# Altium PCB CM5IO_IARC.PcbDoc (part 1 of 2)
Units mm, origin at the board's own origin, x right, y up, seen from the top; angles counter-clockwise.
Board outline 70.16 x 60.25 mm, 4 copper layers (Top Layer 1, Top Layer, Bottom Layer, Bottom Layer 1), stack 1.546 mm thick; 55 components, 163 nets, 374 pads, 88 vias.
Unrouted connection lines stored in the file: 69.
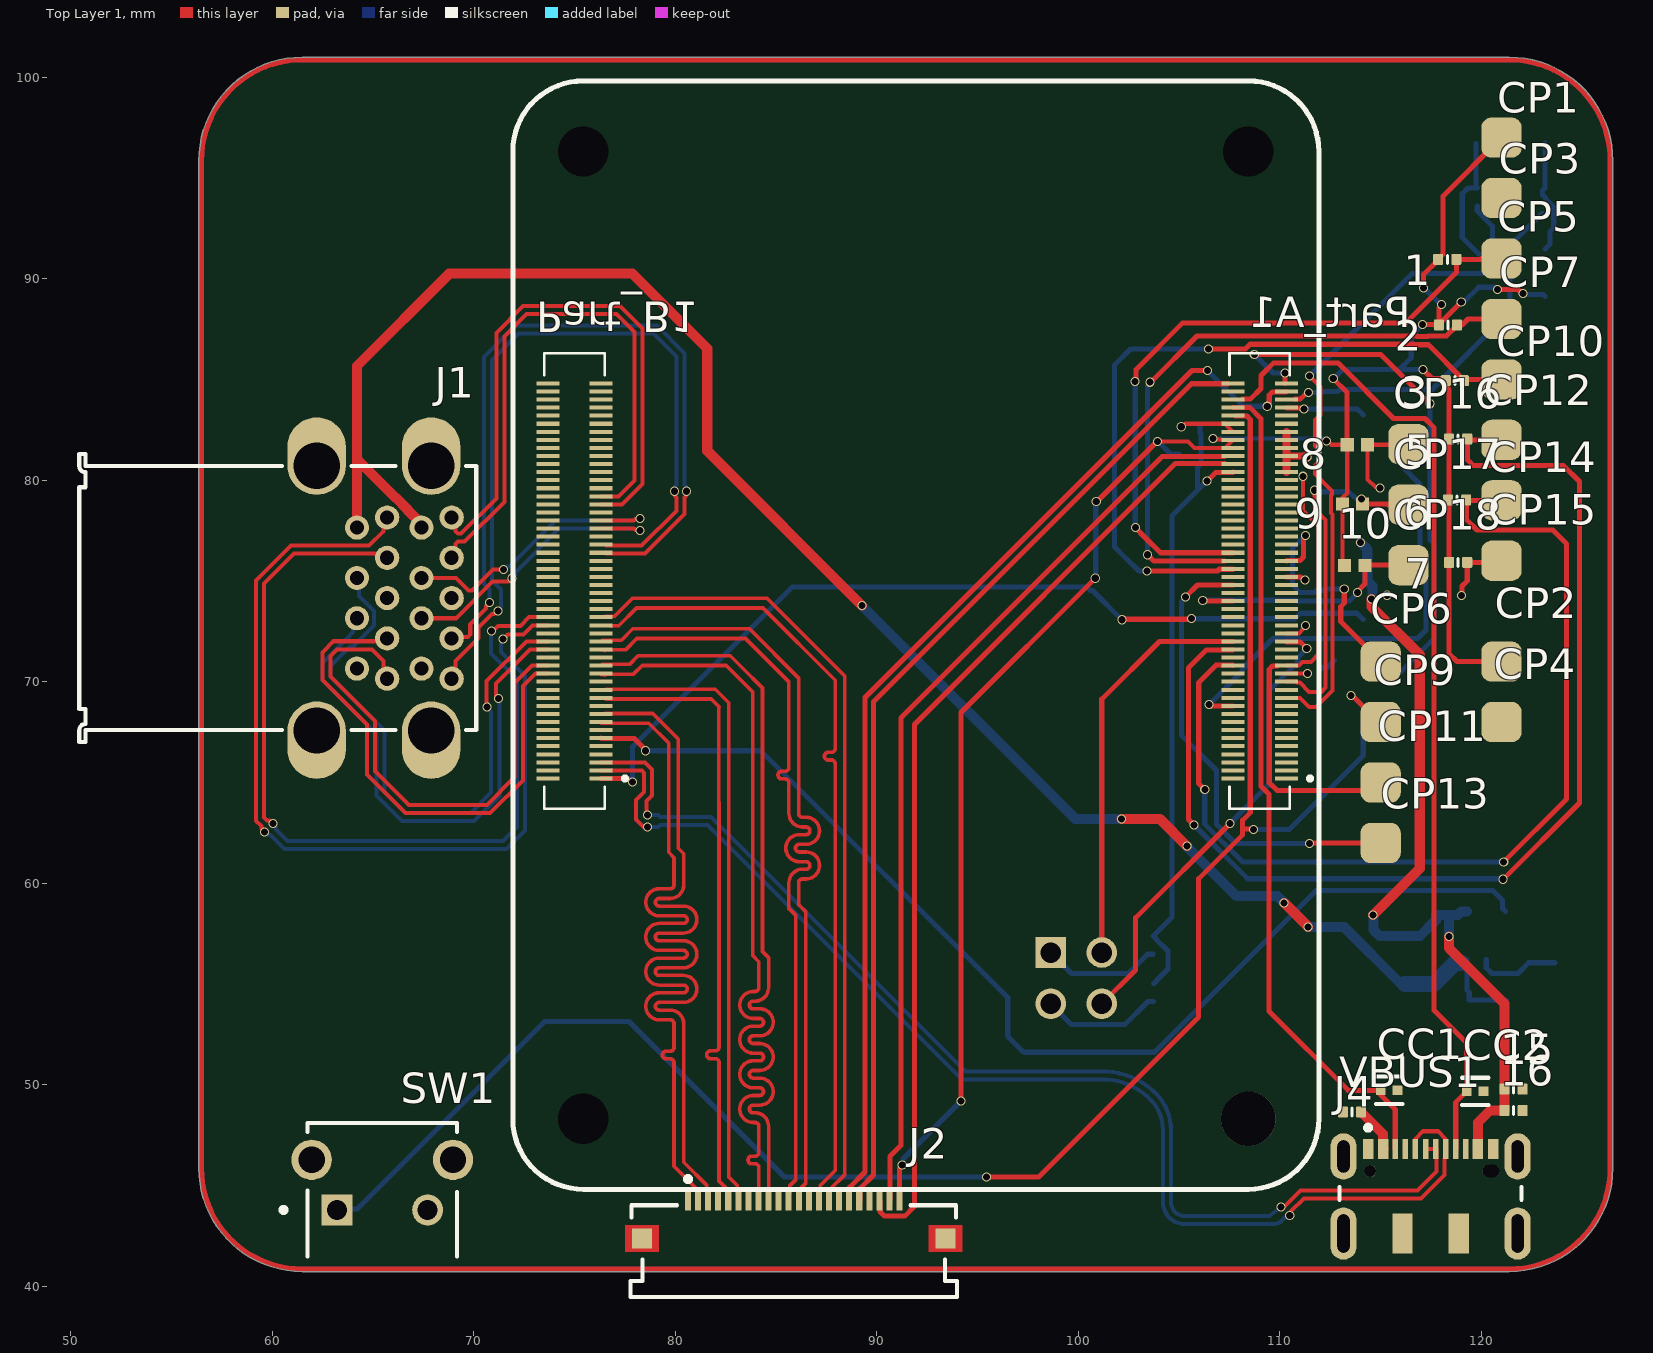
[diagram p0: Top Layer 1 view]
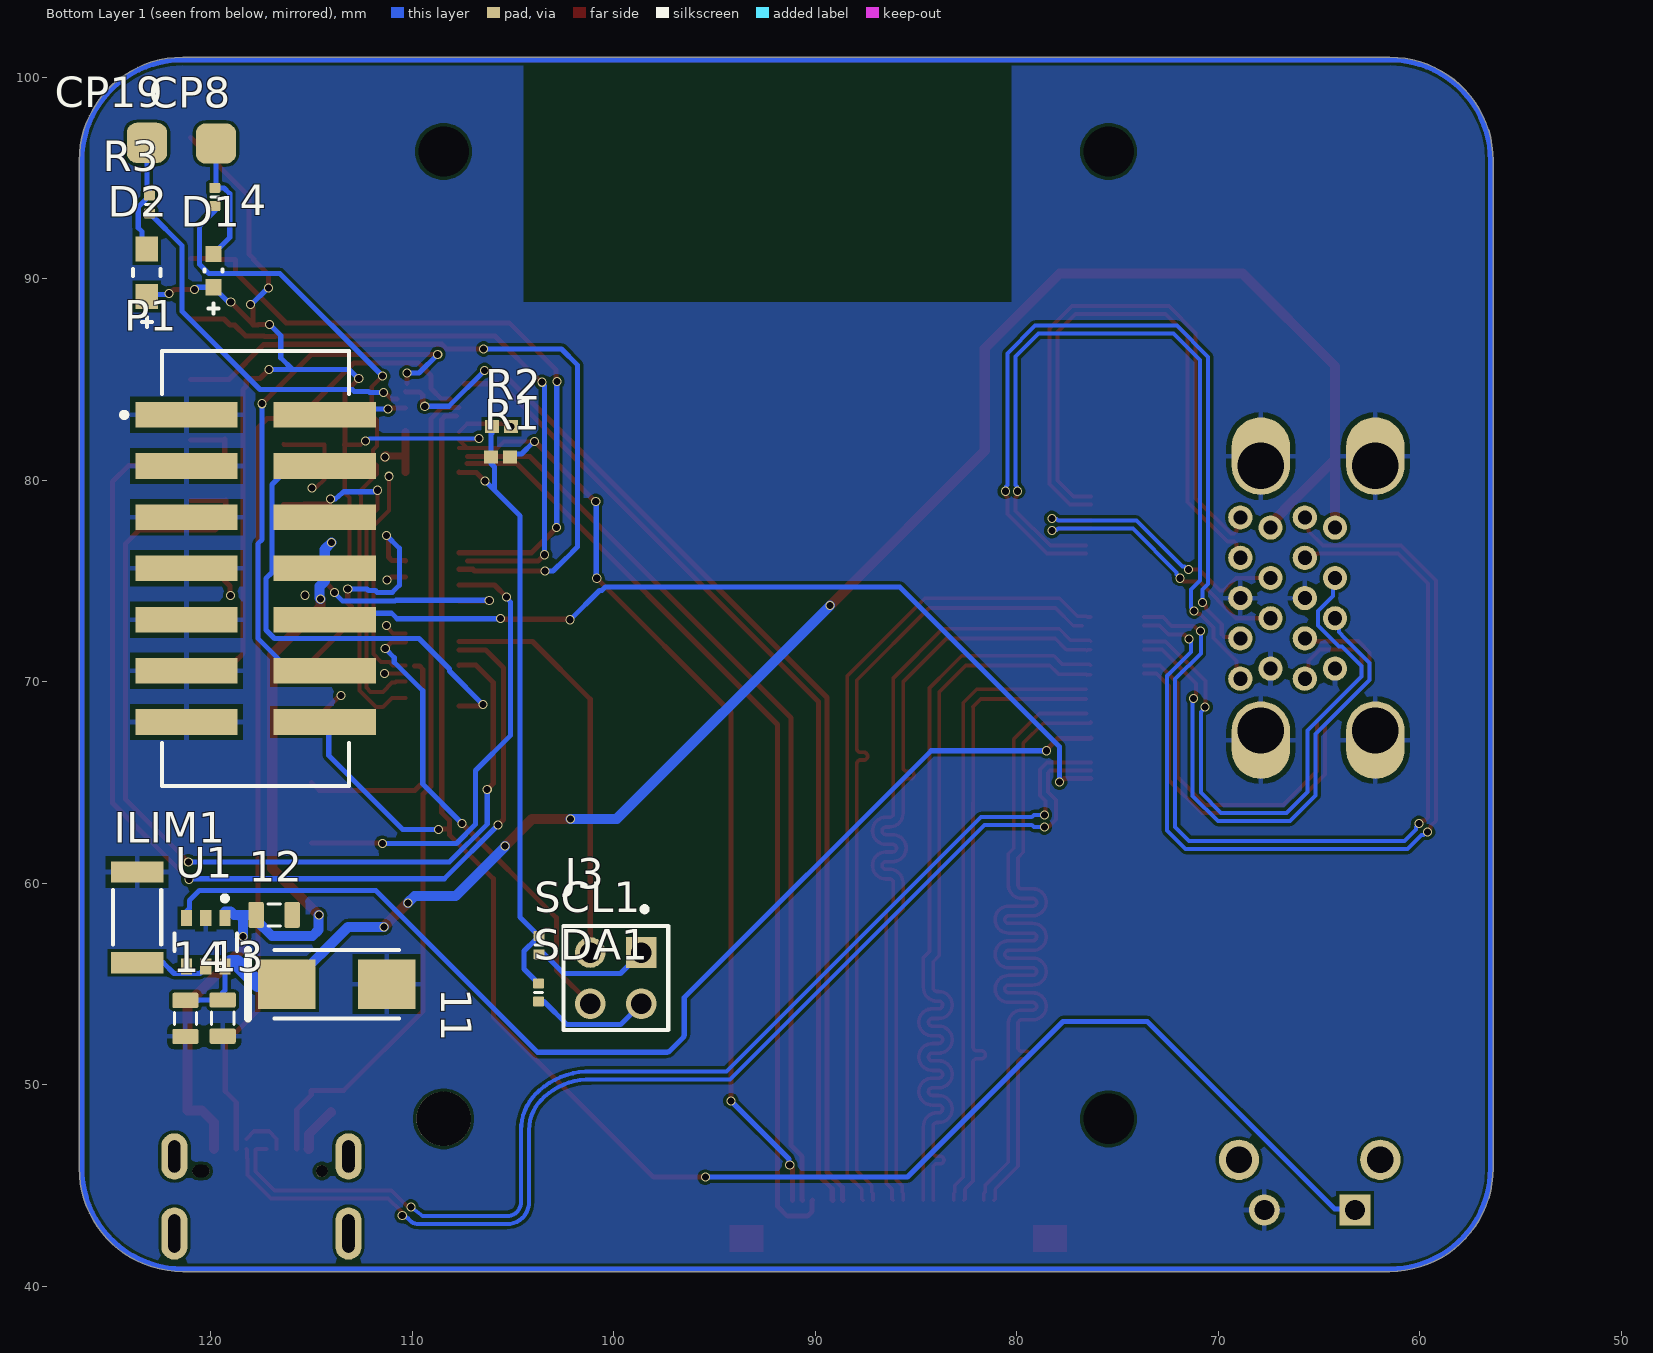
[diagram p1: Bottom Layer 1 view, seen from below]
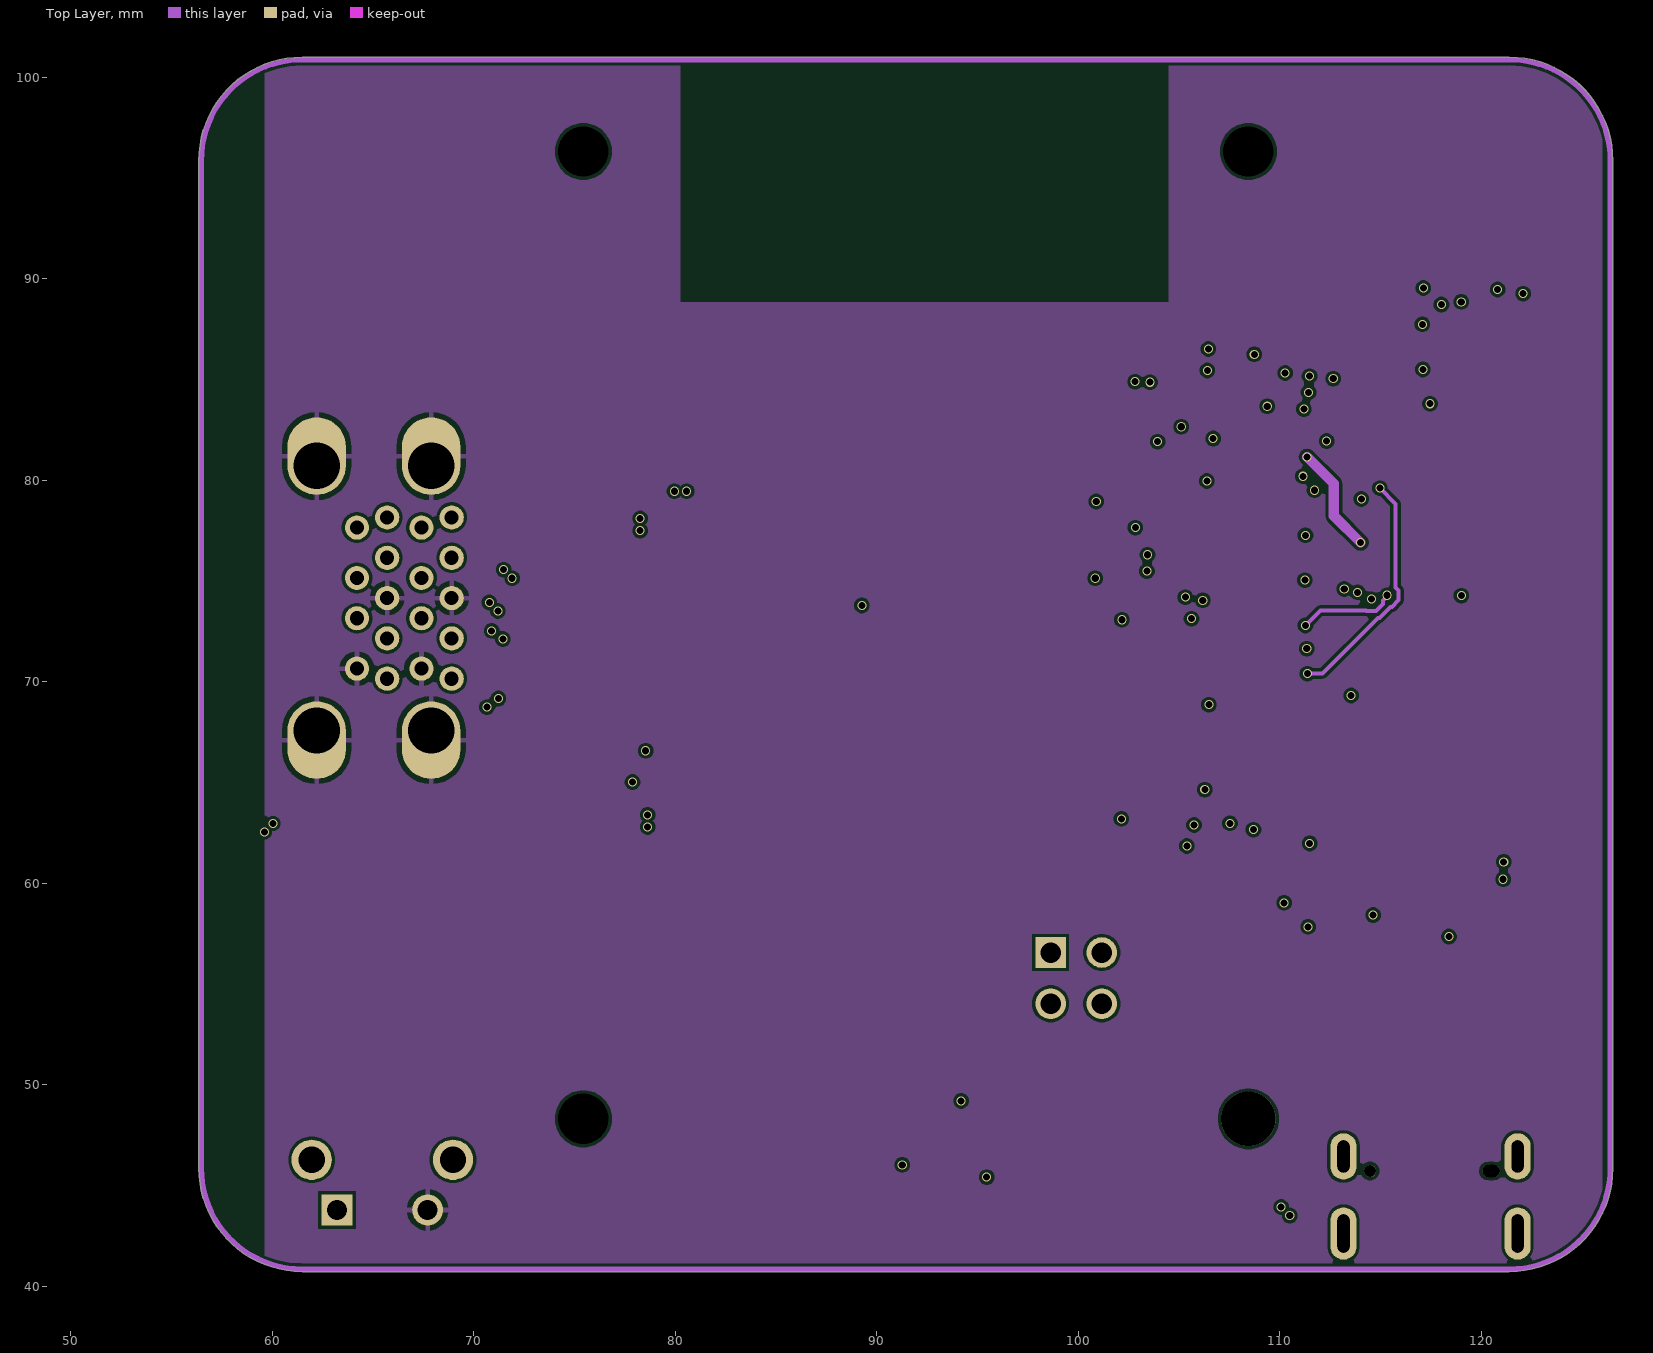
[diagram p2: Top Layer]
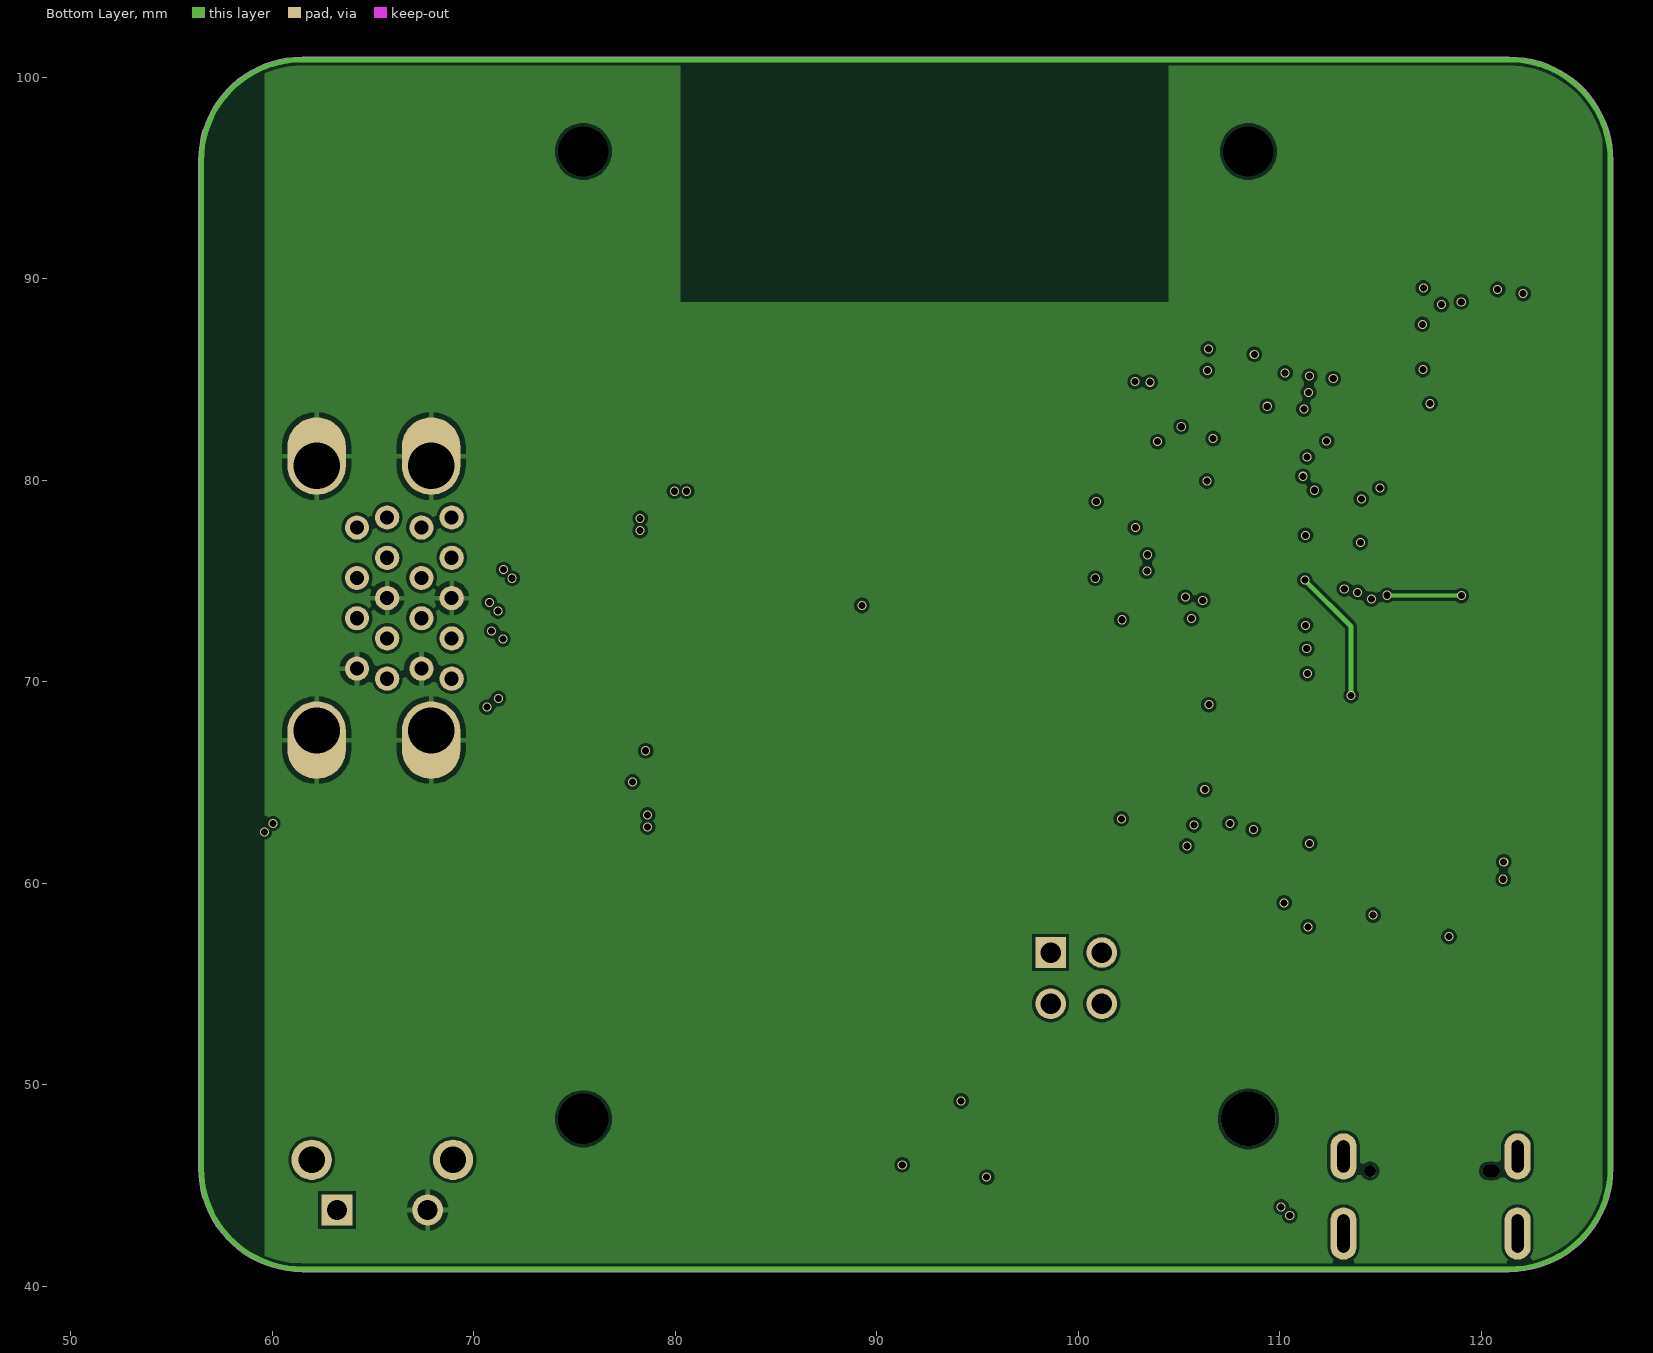
[diagram p3: Bottom Layer]
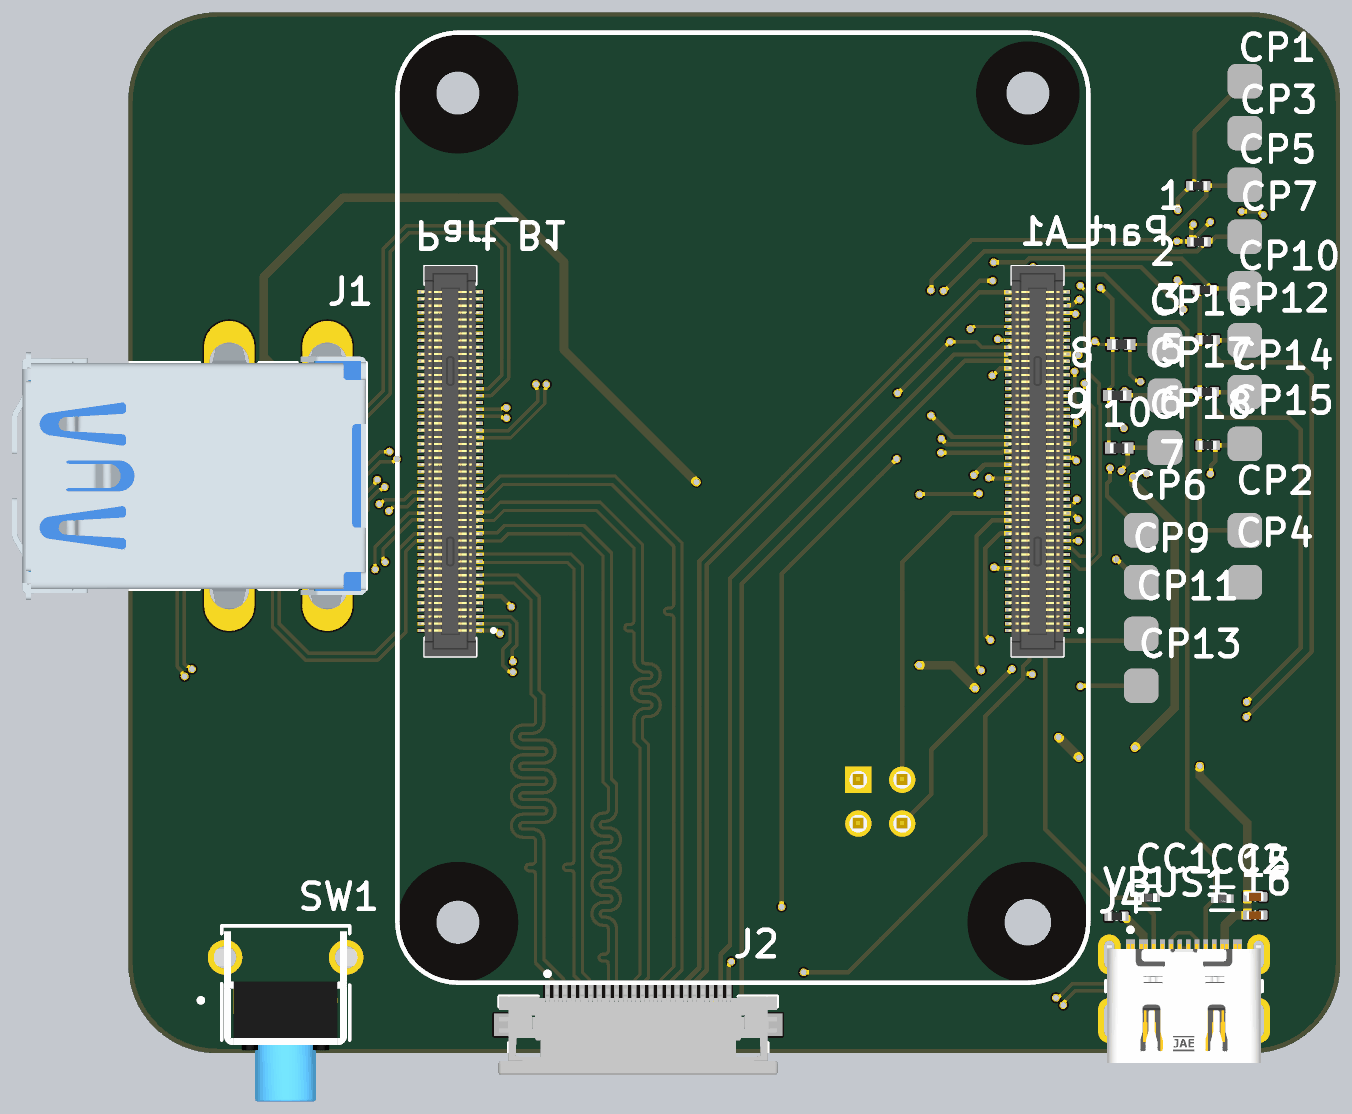
[diagram p5: 3D render of the assembled board from above, using the file's embedded part models]
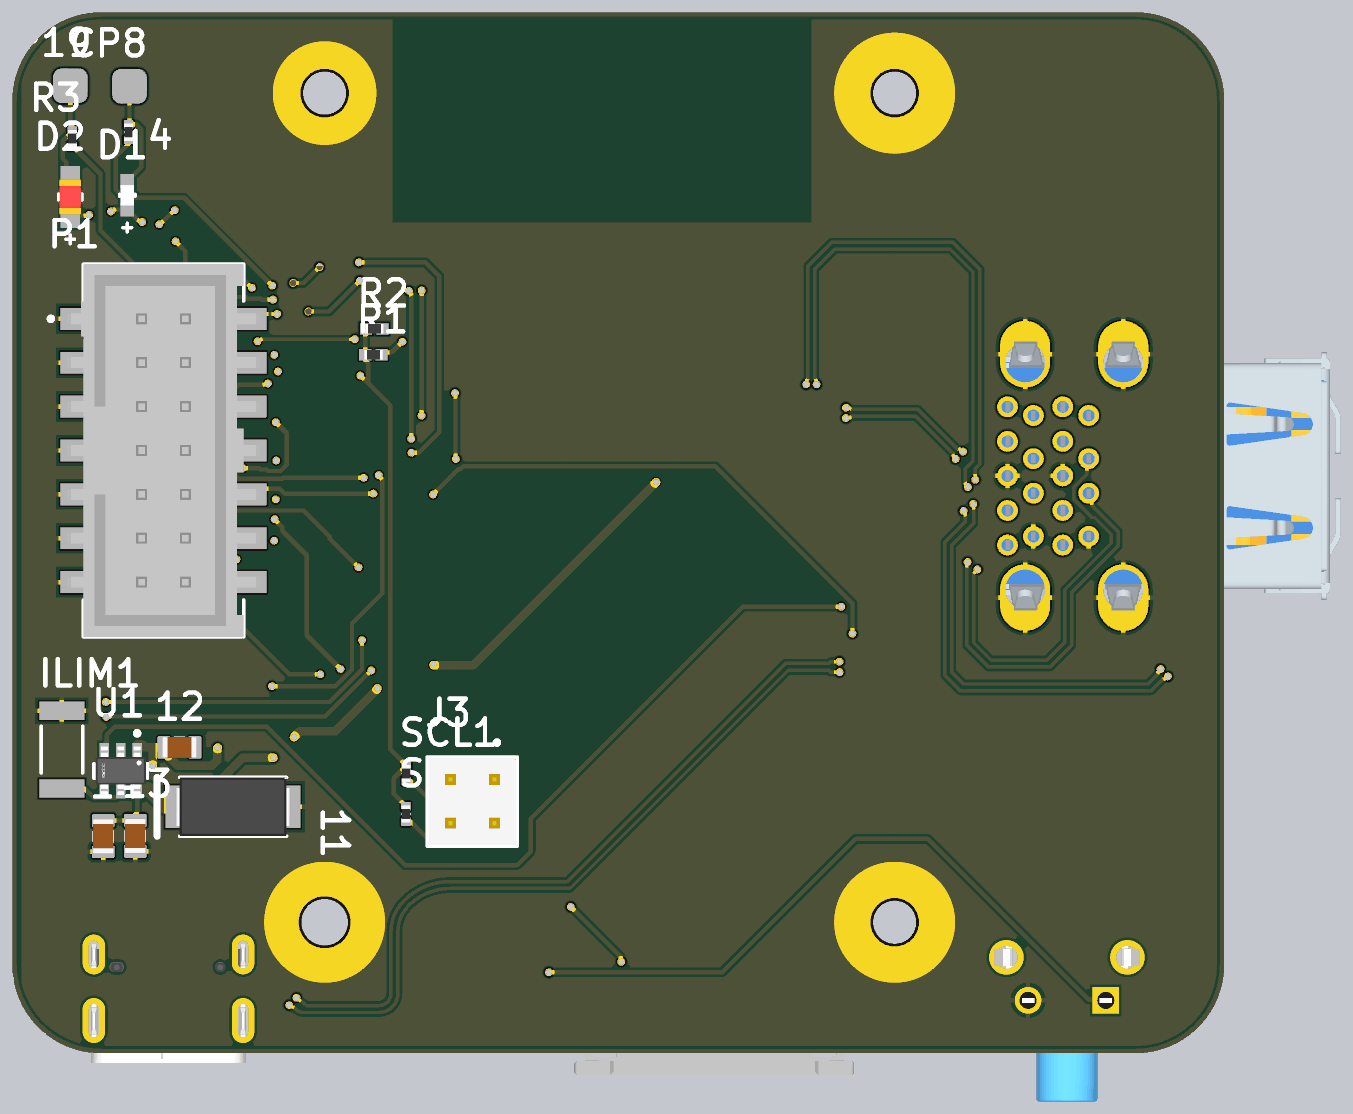
[diagram p6: 3D render of the assembled board from below, using the file's embedded part models]

## Layer stack, top to bottom
Top Solder: solder mask 0.0102, Solder Resist, Dk 3.5
Top Layer 1: signal copper 0.035
Dielectric 2: prepreg 0.12, PP-2116, Dk 4.2
Top Layer: signal copper 0.0356
Dielectric 1: dielectric 1.165, NP-140, Dk 4.4
Bottom Layer: signal copper 0.0356
Dielectric 3: prepreg 0.12, PP-2116, Dk 4.2
Bottom Layer 1: signal copper 0.035
Bottom Solder: solder mask 0.0102, Solder Resist, Dk 3.5

## Board outline
56.361,45.86 ccw(c61.488,45.86) 61.488,40.732 121.39,40.732 ccw(c121.39,45.86) 126.518,45.86 126.518,95.86 ccw(c121.39,95.86) 121.39,100.987 61.488,100.987 ccw(c61.488,95.86) 56.361,95.86

## Design rules (kind name [scope] priority, off if disabled: settings)
Clearance Clearance_3 [ISVIA vs IsTrack] p1: gap=0.254 ignorepadtopadclearanceinfootprint=FALSE
Clearance Clearance_2 [All] p2: gap=0.152 ignorepadtopadclearanceinfootprint=FALSE
Clearance Clearance_1 [All] p3: gap=0.152 ignorepadtopadclearanceinfootprint=FALSE
Clearance [All] p4: gap=0.152 ignorepadtopadclearanceinfootprint=FALSE
ComponentClearance [All] p1: gap=0.152 collisioncheckmode=3 verticalgap=0.152 showdistances=FALSE
DiffPairsRouting DiffPairsRouting_1 [InDifferentialPairClass('Diff_90R')] p1: maxlimit=0.2 minlimit=0.127 mostfreqgap=0.2 toplayer_mingap=0.2 toplayer_minwidth=0.2 toplayer_maxwidth=0.2 toplayer_prefwidth=0.2 midlayer1_maxgap=0.127 midlayer1_prefgap=0.127 midlayer1_minwidth=0.087 midlayer1_maxwidth=0.087 midlayer1_prefwidth=0.087 midlayer2_maxgap=0.127 midlayer2_prefgap=0.127 midlayer2_minwidth=0.087 midlayer2_maxwidth=0.087 midlayer2_prefwidth=0.087 bottomlayer_mingap=0.2 bottomlayer_minwidth=0.2 bottomlayer_maxwidth=0.2 bottomlayer_prefwidth=0.2 impedanceprofiledriven=TRUE impedanceprofileid={12A02680-8168-4E7A-A7E4-821752EDC981} impedanceprofilevalue=90.000000 maxuncoupledlength=12.7
DiffPairsRouting [InDifferentialPairClass('Diff_100R')] p2: maxlimit=0.3 minlimit=0.127 mostfreqgap=0.3 toplayer_mingap=0.3 toplayer_minwidth=0.18 toplayer_maxwidth=0.18 toplayer_prefwidth=0.18 midlayer1_maxgap=0.127 midlayer1_prefgap=0.127 midlayer1_minwidth=0.058 midlayer1_maxwidth=0.058 midlayer1_prefwidth=0.058 midlayer2_maxgap=0.127 midlayer2_prefgap=0.127 midlayer2_minwidth=0.058 midlayer2_maxwidth=0.058 midlayer2_prefwidth=0.058 bottomlayer_mingap=0.3 bottomlayer_minwidth=0.18 bottomlayer_maxwidth=0.18 bottomlayer_prefwidth=0.18 impedanceprofiledriven=TRUE impedanceprofileid={945F2141-8AD6-4F93-AB32-470C4AE7517E} impedanceprofilevalue=100.000000 maxuncoupledlength=12.7
MaxMinImpedance [All] p1: minimum=1.000 maximum=10.00
OvershootRising [All] p1: maximum=1.000
PolygonConnect [All] p1: connectstyle=Relief reliefconductorwidth=0.254 reliefentries=4 polygonreliefangle="90 Angle" airgapwidth=0.254
ReturnPath [All] p1: _gaplimit=0
RoutingVias [All] p1: holewidth=0.35 width=0.45 viastyle="Through Hole" minholewidth=0.35 minwidth=0.45 maxholewidth=0.35 maxwidth=0.45
SMDEntry [All] p1: side=TRUE corner=TRUE anyangle=FALSE
SMDNeckDown [All] p1: percent=50.000
SMDToCorner [All] p1: distance=0
SMDToPlane [All] p1: distance=0
SolderMaskExpansion [All] p1: expansion=0.102 istentingtop=FALSE
SupplyNets "Schematic Supply Nets" [InNet('GND')] p1: voltage=0.000
Width [All] p1: maxlimit=0.5 minlimit=0.2 preferedwidth=0.254
28 further rules are at their usual default settings.

## Classes and differential pairs
differential pair class Diff_100R: DPHY0_C_3 DPHY0_D0_3 DPHY0_D1_3 DPHY0_D2_3 DPHY0_D3_3
differential pair class Diff_90R: USB2_1 USB3-0-D_3 USB3-0-RX_3 USB3-0-TX_3 USB3-1-D_3 USB3-1-RX_3 USB3-1-TX_3
polygon class GND_L02_P000: GND_L03_P000
component class Top: 15 16 CC1 CC2 J4 VBUS1
component class CM5_HighSpeed: 11 12 13 14 ILIM1 J1 J2 J3 Part_B1 SCL1 SDA1 U1
component class CM5_GPIO: 1 2 3 4 5 6 7 8 9 10 CP1 CP2 CP3 CP4 CP5 CP6 CP7 CP8 CP9 CP10 CP11 CP12 CP13 CP14 CP15 CP16 CP17 CP18 CP19 D1 D2 P1 Part_A1 Part_B1 R1 R2 R3 SW1
differential pair USB2_1: +USB2_1_P -USB2_1_N
differential pair USB3-1-TX_3: +USB3-1-TX_3_P -USB3-1-TX_3_N
differential pair USB3-1-RX_3: +USB3-1-RX_3_P -USB3-1-RX_3_N
differential pair USB3-1-D_3: +USB3-1-D_3_P -USB3-1-D_3_N
differential pair USB3-0-TX_3: +USB3-0-TX_3_P -USB3-0-TX_3_N
differential pair USB3-0-RX_3: +USB3-0-RX_3_P -USB3-0-RX_3_N
differential pair USB3-0-D_3: +USB3-0-D_3_P -USB3-0-D_3_N
differential pair DPHY0_D3_3: +DPHY0_D3_3_P -DPHY0_D3_3_N
differential pair DPHY0_D2_3: +DPHY0_D2_3_P -DPHY0_D2_3_N
differential pair DPHY0_D1_3: +DPHY0_D1_3_P -DPHY0_D1_3_N
differential pair DPHY0_D0_3: +DPHY0_D0_3_P -DPHY0_D0_3_N
differential pair DPHY0_C_3: +DPHY0_C_3_P -DPHY0_C_3_N

## Components (designator, comment, footprint, x,y, rotation, side; value= is the part's Value field where it differs from the comment)
1 "Resistor 2K2  +/-5 % 0402 63 mW" RESC0402(1005)_L 118.306,90.957 r180 top value=2.2k
2 "Resistor 2K2  +/-5 % 0402 63 mW" RESC0402(1005)_L 118.339,87.706 r180 top value=2.2k
3 "Resistor 2K2  +/-5 % 0402 63 mW" RESC0402(1005)_L 118.679,84.938 r180 top value=2.2k
4 "1KR2J" RESC0402(1005)_L 119.791,94.052 r90 bottom value=1k
5 "Resistor 2K2  +/-5 % 0402 63 mW" RESC0402(1005)_L 118.847,82.042 r180 top value=2.2k
6 "Resistor 2K2  +/-5 % 0402 63 mW" RESC0402(1005)_L 118.796,79.019 r180 top value=2.2k
7 "Resistor 2K2  +/-5 % 0402 63 mW" RESC0402(1005)_L 118.847,75.921 r180 top value=2.2k
8 "Resistor 10k +/-1% 0402 63 mW" RESC1005X40X25ML05T05 113.843,81.758 r180 top value=10k
9 "Resistor 10k +/-1% 0402 63 mW" RESC1005X40X25ML05T05 113.609,78.809 r180 top value=10k
10 "Resistor 10k +/-1% 0402 63 mW" RESC1005X40X25ML05T05 113.716,75.764 r180 top value=10k
11 "TAJC107K016RNJ" AVX-TAJ-C-2_M 113.74,54.995 r180 bottom value=100µF
12 "Capacitor 10µF +/-20% 25V 0805" CAPC0805(2012)145_L 116.84,58.432 r180 bottom value=10µF
13 "Capacitor 10µF +/-20% 25V 0805" CAPC0805(2012)145_L 119.4,53.303 r270 bottom value=10µF
14 "Capacitor 10µF +/-20% 25V 0805" CAPC0805(2012)145_L 121.252,53.289 r270 bottom value=10µF
15 "Capacitor 100nF +/-20% 50V 0402" CAPC0402(1005)60_L 121.597,49.787 r180 top value=100nF
16 "Capacitor 100nF +/-20% 50V 0402" CAPC0402(1005)60_L 121.598,48.722 r180 top value=100nF
CC1 "RN73R1ETTP5101F25" FP-RN73R1E-IPC_C 115.42,49.726 r0 top
CC2 "RN73R1ETTP5101F25" FP-RN73R1E-IPC_C 119.687,49.675 r0 top
CP1 "TestPoint" TestPoint-Footprint-1#1 121.488,96.495 r0 top
CP2 "TestPoint" TestPoint-Footprint-1#2 121.342,71.36 r90 top
CP3 "TestPoint" TestPoint-Footprint-1#3 121.564,93.396 r90 top
CP4 "TestPoint" TestPoint-Footprint-1#4 121.336,68.326 r90 top
CP5 "TestPoint" TestPoint-Footprint-1#5 121.488,90.526 r90 top
CP6 "TestPoint" TestPoint-Footprint-1#6 115.189,71.069 r90 top
CP7 "TestPoint" TestPoint-Footprint-1#7 121.59,87.782 r90 top
CP8 "TestPoint" TestPoint-Footprint-1#8 119.779,96.668 r90 bottom
CP9 "TestPoint" TestPoint-Footprint-1#9 115.35,68.033 r90 top
CP10 "TestPoint" TestPoint-Footprint-1#10 121.437,84.353 r90 top
CP11 "TestPoint" TestPoint-Footprint-1#11 115.551,65.264 r90 top
CP12 "TestPoint" TestPoint-Footprint-1#12 120.819,81.915 r90 top
CP13 "TestPoint" TestPoint-Footprint-1#13 115.714,61.898 r90 top
CP14 "TestPoint" TestPoint-Footprint-1#14 121.031,78.588 r90 top
CP15 "TestPoint" TestPoint-Footprint-1#15 121.055,75.997 r90 top
CP16 "TestPoint" TestPoint-Footprint-1#16 116.412,81.936 r90 top
CP17 "TestPoint" TestPoint-Footprint-1#17 116.44,78.798 r90 top
CP18 "TestPoint" TestPoint-Footprint-1#18 116.618,75.928 r90 top
CP19 "TestPoint" TestPoint-Footprint-1#8 123.203,96.698 r90 bottom
D1 "AP1608SGC" FP-AP1608SGC-MFG 119.863,90.399 r90 bottom
D2 "AP2012EC" FP-AP2012EC-MFG 123.165,90.297 r90 bottom
ILIM1 "15K 5% 2010(5025)" RESC2010(5025)_L 123.648,58.307 r90 bottom value="15000.00 Ohm"
J1 "692141030100" 692141030100 60.274,74.149 r270 top locked
J2 "54548-2271" MOLX-54548-2271 85.879,43.322 r0 top locked
J3 "HTSW-102-07-G-D" FP-HTSW-102-07-G-D-MFG 99.894,55.292 r0 bottom
J4 "DX07S016JA1R1500" FP-DX07S016JA1R1500-MFG 117.478,43.62 r0 top locked
P1 "HTSS-107-01-T-DV" SMTC-HTSS-107-01-X-DV 117.766,75.623 r270 bottom
Part_A1 "Part_A" AMPHENOL_10164227-1004A1RLF#1 109,75 r270 top locked
Part_B1 "Part_B" AMPHENOL_10164227-1004A1RLF#2 75,75 r270 top locked
R1 "Resistor 0R 0402 63 mW" RESC1005X40X25ML05T10 105.611,81.158 r0 bottom value=0
R2 "Resistor 0R 0402 63 mW" RESC1005X40X25ML05T10 105.56,82.657 r0 bottom value=DNP
R3 "1KR2J" RESC0402(1005)_L 123.038,93.682 r90 bottom value=1k
SCL1 "Resistor 2K2  +/-5 % 0402 63 mW" RESC0402(1005)_L 103.704,56.925 r90 bottom value=2.2k
SDA1 "Resistor 2K2  +/-5 % 0402 63 mW" RESC0402(1005)_L 103.73,54.581 r90 bottom value=2.2k
SW1 "1825027-8" FP-1825027-8-MFG 65.465,42.869 r0 top
U1 "AP22653W6-7" FP-SOT26-MFG 120.242,57.076 r270 bottom
VBUS1 "2D2KR2J" RESC0402(1005)_L 113.578,48.649 r180 top value=2.2k

## Footprints (in the part's own frame and the unit in brackets; to place one, negate y for a bottom-side part, rotate by r counter-clockwise, add the part's x,y. Pads: shape width x height; smd on the part's side, far side on the other; paste and mask are expansions set on the pad)
692141030100 [mm] "USB 3.0 Type A Stacked"
  round 1.2 hole 0.7: A1(-3.5,3.93) A2(-1,3.93) A3(1,3.93) A4(3.5,3.93) A5(4,5.43) A6(2,5.43) A7(0,5.43) A8(-2,5.43) A9(-4,5.43) B1(-3.5,7.13) B2(-1,7.13) B3(1,7.13) B4(3.5,7.13) B5(4,8.63) B6(2,8.63) B7(0,8.63) B8(-2,8.63) B9(-4,8.63)
  oval 3.85x2.9 hole 2.3 copper offset -0.475,0: Shell(-6.57,7.61) Shell(-6.57,1.93)
  oval 3.85x2.9 hole 2.3 copper offset 0.475,0: Shell(6.57,7.61) Shell(6.57,1.93)
  silkscreen extent -7.15,-9.85 7.15,9.85, body extent -7.79,-10.65 7.79,9.85, height 16.16
AMPHENOL_10164227-1004A1RLF#1 [mm]
  rect 0.2x1.14 smd paste-2 mask+0: 1(9.8,1.32) 2(9.8,-1.32) 3(9.4,1.32) 4(9.4,-1.32) 5(9,1.32) 6(9,-1.32) 7(8.6,1.32) 8(8.6,-1.32) 9(8.2,1.32) 10(8.2,-1.32) 11(7.8,1.32) 12(7.8,-1.32) 13(7.4,1.32) 14(7.4,-1.32) 15(7,1.32) 16(7,-1.32) 17(6.6,1.32) 18(6.6,-1.32) 19(6.2,1.32) 20(6.2,-1.32) 21(5.8,1.32) 22(5.8,-1.32) 23(5.4,1.32) 24(5.4,-1.32) 25(5,1.32) 26(5,-1.32) 27(4.6,1.32) 28(4.6,-1.32) 29(4.2,1.32) 30(4.2,-1.32) 31(3.8,1.32) 32(3.8,-1.32) 33(3.4,1.32) 34(3.4,-1.32) 35(3,1.32) 36(3,-1.32) 37(2.6,1.32) 38(2.6,-1.32) 39(2.2,1.32) 40(2.2,-1.32) 41(1.8,1.32) 42(1.8,-1.32) 43(1.4,1.32) 44(1.4,-1.32) 45(1,1.32) 46(1,-1.32) 47(0.6,1.32) 48(0.6,-1.32) 49(0.2,1.32) 50(0.2,-1.32) 51(-0.2,1.32) 52(-0.2,-1.32) 53(-0.6,1.32) 54(-0.6,-1.32) 55(-1,1.32) 56(-1,-1.32) 57(-1.4,1.32) 58(-1.4,-1.32) 59(-1.8,1.32) 60(-1.8,-1.32) 61(-2.2,1.32) 62(-2.2,-1.32) 63(-2.6,1.32) 64(-2.6,-1.32) 65(-3,1.32) 66(-3,-1.32) 67(-3.4,1.32) 68(-3.4,-1.32) 69(-3.8,1.32) 70(-3.8,-1.32) 71(-4.2,1.32) 72(-4.2,-1.32) 73(-4.6,1.32) 74(-4.6,-1.32) 75(-5,1.32) 76(-5,-1.32) 77(-5.4,1.32) 78(-5.4,-1.32) 79(-5.8,1.32) 80(-5.8,-1.32) 81(-6.2,1.32) 82(-6.2,-1.32) 83(-6.6,1.32) 84(-6.6,-1.32) 85(-7,1.32) 86(-7,-1.32) 87(-7.4,1.32) 88(-7.4,-1.32) 89(-7.8,1.32) 90(-7.8,-1.32) 91(-8.2,1.32) 92(-8.2,-1.32) 93(-8.6,1.32) 94(-8.6,-1.32) 95(-9,1.32) 96(-9,-1.32) 97(-9.4,1.32) 98(-9.4,-1.32) 99(-9.8,1.32) 100(-9.8,-1.32)
  silkscreen extent -11.3,-1.5 11.3,2.6, body extent -11.3,-1.69 11.3,1.69, height 4.1
AMPHENOL_10164227-1004A1RLF#2 [mm]
  rect 0.2x1.14 smd paste-2 mask+0: 1(9.8,1.32) 2(9.8,-1.32) 3(9.4,1.32) 4(9.4,-1.32) 5(9,1.32) 6(9,-1.32) 7(8.6,1.32) 8(8.6,-1.32) 9(8.2,1.32) 10(8.2,-1.32) 11(7.8,1.32) 12(7.8,-1.32) 13(7.4,1.32) 14(7.4,-1.32) 15(7,1.32) 16(7,-1.32) 17(6.6,1.32) 18(6.6,-1.32) 19(6.2,1.32) 20(6.2,-1.32) 21(5.8,1.32) 22(5.8,-1.32) 23(5.4,1.32) 24(5.4,-1.32) 25(5,1.32) 26(5,-1.32) 27(4.6,1.32) 28(4.6,-1.32) 29(4.2,1.32) 30(4.2,-1.32) 31(3.8,1.32) 32(3.804,-1.315) 33(3.4,1.32) 34(3.4,-1.32) 35(3,1.32) 36(3,-1.32) 37(2.6,1.32) 38(2.6,-1.32) 39(2.2,1.32) 40(2.2,-1.32) 41(1.8,1.32) 42(1.8,-1.32) 43(1.4,1.32) 44(1.4,-1.32) 45(1,1.32) 46(1,-1.32) 47(0.6,1.32) 48(0.6,-1.32) 49(0.2,1.32) 50(0.2,-1.32) 51(-0.2,1.32) 52(-0.2,-1.32) 53(-0.6,1.32) 54(-0.6,-1.32) 55(-1,1.32) 56(-1,-1.32) 57(-1.4,1.32) 58(-1.4,-1.32) 59(-1.8,1.32) 60(-1.8,-1.32) 61(-2.2,1.32) 62(-2.2,-1.32) 63(-2.6,1.32) 64(-2.6,-1.32) 65(-3,1.32) 66(-2.993,-1.322) 67(-3.4,1.32) 68(-3.4,-1.32) 69(-3.8,1.32) 70(-3.8,-1.32) 71(-4.2,1.32) 72(-4.2,-1.32) 73(-4.6,1.32) 74(-4.6,-1.32) 75(-5,1.32) 76(-5,-1.32) 77(-5.4,1.32) 78(-5.4,-1.32) 79(-5.8,1.32) 80(-5.8,-1.32) 81(-6.2,1.32) 82(-6.2,-1.32) 83(-6.6,1.32) 84(-6.6,-1.32) 85(-7,1.32) 86(-7,-1.32) 87(-7.4,1.32) 88(-7.4,-1.32) 89(-7.8,1.32) 90(-7.8,-1.32) 91(-8.2,1.32) 92(-8.2,-1.32) 93(-8.6,1.32) 94(-8.6,-1.32) 95(-9,1.32) 96(-9,-1.32) 97(-9.4,1.32) 98(-9.4,-1.32) 99(-9.8,1.32) 100(-9.8,-1.32)
  silkscreen extent -11.3,-1.5 11.3,2.6, body extent -11.3,-1.69 11.3,1.69, height 4.1
AVX-TAJ-C-2_M [mm] "Molded Capacitor, 2-Leads, Body 6.2x3.4mm, IPC Low Density"
  rect 2.85x2.45 smd: 1(-2.475,0) 2(2.475,0)
  silkscreen extent -4.4,-1.7 3.1,1.7, body extent -3.32,-1.7 3.32,1.7, height 2.8
CAPC0402(1005)60_L [mm] "Chip Capacitor, Body 1.0x0.5mm, Height 0.6mm, IPC High Density"
  rrect25% 0.5x0.55 smd: 1(-0.45,0) 2(0.45,0)
  silkscreen extent 0,-0.2 0,0.2, body extent -0.5,-0.25 0.5,0.25, height 0.6
CAPC0805(2012)145_L [mm] "Chip Capacitor, Body 2.0x1.2mm, Height 1.45mm, IPC High Density"
  rrect25% 0.76x1.3 smd: 1(-0.9,0) 2(0.89,0)
  silkscreen extent -0.3,-0.55 0.3,0.55, body extent -1,-0.6 1,0.6, height 1.45
FP-1825027-8-MFG [mm]
  rect 1.54x1.54 hole 0.99 paste-2539.97 mask+0: 1(-2.25,0.92)
  round 1.54 hole 0.99 paste-2539.97 mask+0: 2(2.25,0.92)
  round 2 hole 1.3 paste-2539.97 mask+0: 3(-3.505,3.41) 4(3.505,3.41)
  silkscreen extent -5.03,-1.38 3.7,5.23, body extent -4.21,-4.92 4.2,4.92, height 7.31
FP-AP1608SGC-MFG [mm]
  rect 0.8x0.8 smd paste+0 mask+0: 1(-0.825,0) 2(0.825,0)
  silkscreen extent -2.12,-0.45 0.05,0.45, body extent -0.8,-0.4 0.8,0.4, height 1.1
FP-AP2012EC-MFG [mm]
  rect 1.25x1.1 smd paste+0 mask+0: 1(-1.175,0) 2(1.175,0)
  silkscreen extent -2.7,-0.67 0.18,0.67, body extent -1,-0.63 1,0.63, height 1.1
FP-DX07S016JA1R1500-MFG [mm]
  rrect100% 1.3x2.3 hole 1.6 slot 0.6 at 0 deg paste-2539.97 mask+0: 1(-4.32,2.825) 2(4.32,2.825)
  rrect100% 1.3x2.6 hole 1.9 slot 0.6 at 0 deg paste-2539.97 mask+0: 3(-4.32,-1) 6(4.32,-1)
  rect 1x2 smd paste+0 mask+0: 4(-1.4,-1) 5(1.4,-1)
  rect 0.52x1 smd paste+0 mask+0: A1/B12(-3.1,3.2) A4/B9(-2.35,3.2) A12/B1(3.1,3.2) B4/A9(2.35,3.2)
  rect 0.27x1 smd paste+0 mask+0: A5(-1.75,3.2) A6(-0.25,3.2) A7(0.75,3.2) A8(1.75,3.2) B5(1.25,3.2) B6(0.25,3.2) B7(-0.75,3.2) B8(-1.25,3.2)
  round 0.6 hole 0.6 unplated paste-2539.97 mask+0: ""(-3,2.1)
  rrect100% 0.85x0.6 hole 0.6 slot 0.85 at 0 deg unplated paste-2539.97 mask+0: ""(3,2.1)
  silkscreen extent -4.52,0.67 4.52,4.37, body extent -4.47,-3.47 4.47,3.43, height 3.31
FP-HTSW-102-07-G-D-MFG [mm]
  rect 1.52x1.52 hole 1.02 paste-2539.97 mask+0: 1(-1.27,-1.27)
  round 1.52 hole 1.02 paste-2539.97 mask+0: 2(-1.27,1.27) 3(1.27,-1.27) 4(1.27,1.27)
  silkscreen extent -2.6,-3.54 2.6,2.58, body extent -2.55,-2.56 2.53,2.52, height 8.7
FP-RN73R1E-IPC_C [mm]
  rect 0.488x0.472 smd paste+0 mask+0: 1(-0.414,0) 2(0.414,0)
  silkscreen extent -0.66,-0.67 0.66,0.67, body extent -0.76,-0.38 0.76,0.38, height 0.25
FP-SOT26-MFG [mm]
  rect 0.8x0.55 smd paste+0 mask+0: 1(-1.2,0.95) 2(-1.2,0) 3(-1.2,-0.95) 4(1.2,-0.95) 5(1.2,0) 6(1.2,0.95)
  silkscreen extent -2.3,-1.55 0.43,1.55, body extent -1.4,-1.45 1.4,1.45, height 1.45
MOLX-54548-2271 [mm] "FPC Connector, 22-Leads, Right Angle, Pitch 0.5 mm, Mated Height 1.2 mm, SMT"
  rect 0.3x1 smd: 1(-5.25,0.95) 2(-4.75,0.95) 3(-4.25,0.95) 4(-3.75,0.95) 5(-3.25,0.95) 6(-2.75,0.95) 7(-2.25,0.95) 8(-1.75,0.95) 9(-1.25,0.95) 10(-0.75,0.95) 11(-0.25,0.95) 12(0.25,0.95) 13(0.75,0.95) 14(1.25,0.95) 15(1.75,0.95) 16(2.25,0.95) 17(2.75,0.95) 18(3.25,0.95) 19(3.75,0.95) 20(4.25,0.95) 21(4.75,0.95) 22(5.25,0.95)
  rect 1x1 smd: MP1(-7.525,-0.95) MP2(7.525,-0.95)
  Top Layer 1 region: 8.35,-0.3 6.7,-0.3 6.7,-1.6 8.35,-1.6
  Top Layer 1 region: -8.35,-0.3 -6.7,-0.3 -6.7,-1.6 -8.35,-1.6
  silkscreen extent -8.1,-3.85 8.1,2.13, body extent -8.1,-3.85 8.1,1.15, height 1.21
RESC0402(1005)_L [mm] "Chip Resistor, Body 1.0x0.5mm, IPC High Density"
  rrect25% 0.5x0.55 smd: 1(-0.45,0) 2(0.45,0)
  silkscreen extent 0,-0.2 0,0.2, body extent -0.5,-0.25 0.5,0.25, height 0.3
RESC1005X40X25ML05T05 [mm] "Chip Resistor, 2-Leads, Body 1.05x0.55mm, IPC Low Density"
  rect 0.65x0.65 smd: 1(-0.5,0) 2(0.5,0)
  body extent -0.53,-0.28 0.53,0.28, height 0.4
RESC1005X40X25ML05T10 [mm] "Chip Resistor, 2-Leads, Body 1.05x0.55mm, IPC Low Density"
  rect 0.7x0.65 smd: 1(-0.475,0) 2(0.475,0)
  body extent -0.53,-0.28 0.53,0.28, height 0.4
RESC2010(5025)_L [mm] "Chip Resistor, Body 5.0x2.5mm, IPC High Density"
  rect 1.05x2.6 smd: 1(-2.25,0) 2(2.25,0)
  silkscreen extent -1.35,-1.2 1.35,1.2, body extent -2.6,-1.35 2.6,1.35, height 0.71
SMTC-HTSS-107-01-X-DV [mm] "High Temp Top Shroud, 2x7 Pins, Vertical, 2.54mm Pitch, Male"
  rect 1.27x5.08 smd: 1(-7.62,-3.43) 2(-7.62,3.43) 3(-5.08,-3.43) 4(-5.08,3.43) 5(-2.54,-3.43) 6(-2.54,3.43) 7(0,-3.43) 8(0,3.43) 9(2.54,-3.43) 10(2.54,3.43) 11(5.08,-3.43) 12(5.08,3.43) 13(7.62,-3.43) 14(7.62,3.43)
  silkscreen extent -10.8,-6.65 10.8,4.63, body extent -10.8,-5.59 10.79,5.59, height 10.16
TestPoint-Footprint-1#1 [mm]
  rrect50% 2x2 smd paste-2539.97 mask-2539.97: 1(-0.488,0.505)
TestPoint-Footprint-1#2 [mm]
  rrect50% 2x2 smd paste-2539.97 mask-2539.97: 1(-0.36,0.342)
TestPoint-Footprint-1#3 [mm]
  rrect50% 2x2 smd paste-2539.97 mask-2539.97: 1(0.604,0.564)
TestPoint-Footprint-1#4 [mm]
  rrect50% 2x2 smd paste-2539.97 mask-2539.97: 1(-0.326,0.336)
TestPoint-Footprint-1#5 [mm]
  rrect50% 2x2 smd paste-2539.97 mask-2539.97: 1(0.474,0.488)
TestPoint-Footprint-1#6 [mm]
  rrect50% 2x2 smd paste-2539.97 mask-2539.97: 1(-0.069,0.189)
TestPoint-Footprint-1#7 [mm]
  rrect50% 2x2 smd paste-2539.97 mask-2539.97: 1(0.218,0.59)
TestPoint-Footprint-1#8 [mm]
  rrect50% 2x2 smd paste-2539.97 mask+0.102: 1(0.039,-0.045)
TestPoint-Footprint-1#9 [mm]
  rrect50% 2x2 smd paste-2539.97 mask-2539.97: 1(-0.033,0.35)
TestPoint-Footprint-1#10 [mm]
  rrect50% 2x2 smd paste-2539.97 mask-2539.97: 1(0.647,0.437)
TestPoint-Footprint-1#11 [mm]
  rrect50% 2x2 smd paste-2539.97 mask-2539.97: 1(-0.264,0.551)
TestPoint-Footprint-1#12 [mm]
  rrect50% 2x2 smd paste-2539.97 mask-2539.97: 1(0.085,-0.181)
TestPoint-Footprint-1#13 [mm]
  rrect50% 2x2 smd paste-2539.97 mask-2539.97: 1(0.102,0.714)
TestPoint-Footprint-1#14 [mm]
  rrect50% 2x2 smd paste-2539.97 mask-2539.97: 1(0.412,0.031)
TestPoint-Footprint-1#15 [mm]
  rrect50% 2x2 smd paste-2539.97 mask-2539.97: 1(0.003,0.055)
TestPoint-Footprint-1#16 [mm]
  rrect50% 2x2 smd paste-2539.97 mask-2539.97: 1(-0.152,0.034)
TestPoint-Footprint-1#17 [mm]
  rrect50% 2x2 smd paste-2539.97 mask-2539.97: 1(-0.014,0.062)
TestPoint-Footprint-1#18 [mm]
  rrect50% 2x2 smd paste-2539.97 mask-2539.97: 1(-0.144,0.24)

## Part data
1 2 3 5 6 7 SCL1 SDA1: library part CMP-009-00166-3, "Chip Resistor, 2,2 kOhms, +/-5 %, 63 mW, -55 to 155 degC, 0402", Case/Package=0402, Max Operating Temperature=155°C, Min Operating Temperature=-55°C, Power=63mW, Tolerance=5%, Pins=2
4 R3: library part CMP-009-00075-2, "1K 0.063W 5% 0402 (1005 Metric)  SMD", Case/Package=0402, Power=63mW, Tolerance=5%, Mounting Technology=SMT, Pins=2
8 9 10: library part CMP-009-00019-5, "Chip Resistor, 10 KOhm, +/- 1%, 63 mW, -55 to 155 degC, 0402 (1005 Metric)", Case/Package=0402, Max Operating Temperature=155°C, Min Operating Temperature=-55°C, Power=63mW, Tolerance=1%, Voltage Rating=50V, Mounting Technology=SM, Pins=2, RoHS Compliant=True
11: library part CMP-001-00046-7, "Standard Tantalum, 100 uF, +/- 10%, 16 V, -55 to 125 degC, 2312 (6032 Metric), RoHS, Tape and Reel", Capacitor Type=Tantalum, Case/Package=2412, Manufacturer=AVX, Max Operating Temperature=125°C, Min Operating Temperature=-55°C, Package Description="2-Pin Surface Mount Device, Body 6 x 3.25 mm", Package Quantity=500, Package Reference=TAJ-C-2, Resistance=1Ohm, Tolerance=10%, Voltage Rating=16V, Datasheet URL=http://datasheets.avx.com/TAJ.pdf, Datasheet Version=Feb-16, ESR=1Ohm, Manufacturer URL=http://www.avx.com/, Mounting Technology=SM, Packaging=TapeandReel, RoHS Compliant=True
12 13 14: library part CMP-001-00079-4, "Chip Capacitor, 10µF +/-20%, 25V, 0805, Thickness 1.45 mm", Case/Package=0805, Max Operating Temperature=85°C, Min Operating Temperature=-55°C, Tolerance=10%, Voltage Rating=25V, Mounting Technology=SMT, Pins=2
15 16: library part CMP-001-00067-3, "Chip Capacitor, 100nF +/-20%, 50V, 0402, Thickness 0.6 mm", Case/Package=0402, Max Operating Temperature=85°C, Min Operating Temperature=-55°C, Tolerance=10%, Voltage Rating=50V, Mounting Technology=SMT, Pins=2
CC1 CC2: library part CMP-04015-008529-1, "5.1kΩ ±1% 0.063W, 1/16W Chip Resistor 0402 (1005 Metric) Moisture Resistant Thin Film"
CP1 CP2 CP3 CP4 CP5 CP6 CP7 CP8 CP9 CP10 CP11 CP12 CP13 CP14 CP15 CP16 CP17 CP18 CP19: library part CMP-011-000005-2, Design Item ID=TestPoint, Source=CM5_GPIO.SchLib
D1: library part CMP-44529-000023-1, "Standard LEDs - SMD GREEN WATER CLEAR", Case/Package=0603, Color=Green, Forward Current=20mA, Forward Voltage=2.2V, Lens Color=Clear, Max Operating Temperature=85°C, Min Operating Temperature=-40°C, Package Quantity=2000, Illumination Color=Green, Lead Free="Lead Free", Lens Style=Clear, Luminous Intensity=15mcd, Mount="Surface Mount", Packaging="Tape and Reel", Viewing Angle=120°, Wavelength=568nm
D2: library part CMP-44529-000070-1, "LED RED CLEAR SMD", Case Code (Imperial)=0805, Case Code (Metric)=2012, Color=Red, Forward Current=20mA, Forward Voltage=2V, Max Operating Temperature=85°C, Min Operating Temperature=-40°C, Package Quantity=2000, Case/Package=0805, Dominant Wavelength=625nm, Height=1.1mm, Illumination Color=Red, Lead Free="Lead Free", Length=2mm, Lens Style=Clear, Luminous Intensity=15mcd, Mount="Surface Mount", Packaging="Tape and Reel", RoHS Compliant=Yes, Test Current=20mA, Viewing Angle=120°, Wavelength=627nm, Width=1.25mm
ILIM1: library part CMP-1017-00102-1, "15K 0.75W 5% 2010 (5025 Metric)  SMD", Case-EIA=2010, Case-Metric=5025, Power="0.75 W", Tolerance="5 %", Technology=SMT
J1: library part CMP-1502-03222-4, "Wr-com, Right Angle Version 3.0; Connector, Through Hole Socket, 30 V, 250MA", Color=Blue, Contact Resistance=50mΩ, Current Rating=250mA, Flammability Rating="UL94 V-0", Insulation Resistance=100MΩ, Max Operating Temperature=85°C, Min Operating Temperature=-40°C, Operating Supply Voltage=30V, Connector Type=USB, Contact Material="Gold, Nickel", Contact Plating=Gold, Features=Shielded, Gender=Receptacle, Height=16.335mm, Lead Free="Lead Free", Length=15.59mm, Mount="Horizontal, Through Hole", Number of Contacts=18, Number of Pins=18, Number of Ports=2, Orientation="Right Angle", REACH SVHC=Unknown, RoHS=Compliant, Termination="Through Hole", USB Standard="USB 3.0", Voltage Rating=30V, Voltage Rating (AC)=30V, Width=19.7mm
J2: library part CMP-1241-00555-1, "0.5 mm Pitch Easy-On(TM) Type FPC Connector, 1.2 mm Mated Height, Right Angle, ZIF, SMT, Bottom Contact, 22 Circuits, -20 to 85 degC, ELV and RoHS Compliant, Tape and Reel", Current (Max per Contact)=0.5A, Manufacturer=Molex, Voltage (Max)=50V, Circuits (Loaded)=22, ComponentLink1Description="Manufacturer URL", ComponentLink1URL=http://www.molex.com/molex/index.jsp, ComponentLink2Description=Datasheet, ComponentLink2URL=http://www.molex.com/webdocs/datasheets/pdf/en-us/0545482271_FFC_FPC_CONNECTORS.pdf, ComponentLink3Description="Package Specification", ComponentLink3URL=http://www.molex.com/pdm_docs/sd/545482171_sd.pdf, Contact Position=Bottom, Durability (mating cycles max)=20, Entry Angle="90degrees Angle", Mated Height=1.20mm, Material - Metal="Phosphor Bronze", Material - Plating Mating=Gold, Material - Plating Termination=Tin, Mounting Technology="Surface Mount", Number of Rows=1, Orientation="Right Angle", PackageDescription="22-Lead FPC Connector, Pitch 0.5 mm", PackageReference=54548-2271, PackageVersion="Rev. N, 06/2008", Packing="Tape and Reel", PartNumber=54548-2271, PCB Locator=No, PCB Retention=Yes, Pitch - Mating Interface=0.50mm, Polarized to PCB=Yes, RoHS=TRUE, Stackable=No
J3: library part CMP-02766-000010-1, "CONN HEADER VERT 4POS 2.54MM", Current Rating=6.3A, Manufacturer=Samtec, Temperature="-55°C to +125°C", Temperature Range High=+125°C, Temperature Range Low=-55°C, Voltage Rating=550V, Automotive=No, Category=Conn, ComponentLink2Description=Datasheet, ComponentLink2URL=http://suddendocs.samtec.com/catalog_english/htsw_th.pdf, Conn Gender=Male, Conn Orientation=Straight, Contact Material=Gold,Nickel, Device Class L1=Connectors, Device Class L2="Headers and Wire Housings", Device Class L3=unset, Digikey Description="CONN HEADER VERT 4POS 2.54MM", Height=8.71mm, Lead Free=Yes, Manufacturer Part Number=HTSW-102-07-G-D, Mouser Description="Conn Unshrouded Header HDR 4 POS 2.54mm Solder ST Thru-Hole Bag", Number of Contacts=4, Number of Rows=2, Octopart=https://octopart.com/htsw-102-07-g-d-samtec-10531767, Package=HTSW-102-07-G-D, Pitch=2.54mm, RoHS=TRUE
J4: library part CMP-19038-000003-1, "CONN RCP USB2.0 TYP C 24P SMD RA"
P1: library part CMP-1024-00046-1, "Shrouded .025\" SQ Post Header, Surface Mount, Vertical, -55 to 105 degC, 2.54 mm Pitch, 14-Pin, Male, RoHS", Manufacturer=Samtec, Temperature Range="-55 to 105 degC", ComponentLink1Description="Manufacturer URL", ComponentLink1URL=http://www.samtec.com, ComponentLink2Description=Datasheet, ComponentLink2URL=http://www.samtec.com/documents/webfiles/pdf/htss.pdf, ComponentLink3Description="Package Specification", ComponentLink3URL=http://www.samtec.com/documents/webfiles/cpdf/HTSS-1XX-01-XX-DV-X-XX-X-XX-MKT.pdf, DatasheetVersion=F-214, Mounting Technology="Surface Mount", Orientation=Vertical, PackageDescription="High Temp Top Shroud", PackageReference=HTSS-107-01-X-DV, PackageVersion="Z, 7/2001", PartNumber=HTSS-107-01-T-DV, Pitch="2.54 mm", RoHS=True
R1: library part CMP-009-00004-5, "Chip Resistor, 0 Ohm, 0.063 W, -55 to 155 degC, 0402 (1005 Metric)", Case/Package=0402, Max Operating Temperature=155°C, Min Operating Temperature=-55°C, Power=63mW, Voltage Rating=50V, Mounting Technology=SM, Pins=2, RoHS Compliant=True
R2: library part CMP-009-00004-5, "Chip Resistor, 0 Ohm, 0.063 W, -55 to 155 degC, 0402 (1005 Metric)", Case/Package=0402, Max Operating Temperature=155°C, Min Operating Temperature=-55°C, Power=0, Voltage Rating=50V, Mounting Technology=SM, Pins=2, RoHS Compliant=True
SW1: library part CMP-2000-05515-2, "SWITCH TACTILE SPST-NO 0.05A 24V", Contact Current Rating=50mA, Contact Resistance=100mΩ, Manufacturer="TE Connectivity", Operating Force=1.6N, Temperature="-35°C to +85°C", Temperature Range High=+85°C, Temperature Range Low=-35°C, Voltage Rating Dc=24V, Automotive=No, Category=Switch, ComponentLink2Description=Datasheet, ComponentLink2URL=https://www.te.com/commerce/DocumentDelivery/DDEController?Action=showdoc&DocId=Customer+Drawing%7F1825027%7FG4%7Fpdf%7FEnglish%7FENG_CD_1825027_G4.pdf%7F1825027-8, Device Class L1=Electromechanical, Device Class L2=Switches, Device Class L3="Pushbutton Switches", Digikey Description="SWITCH TACTILE SPST-NO 0.05A 24V", Electromechanical Life=100000Cycles, Height=7.31mm, Lead Free=Yes, Manufacturer Part Number=1825027-8, Mount="Through Hole", Mouser Description="Tactile Switches R/A TACT 160G PB SWITCH", Octopart=https://octopart.com/1825027-8-te+connectivity-41891101, Package=1825027-8, RoHS=TRUE, Throw Configuration=SPST-NO
U1: library part CMP-12749-000002-1, "LOAD SWITCH,SOT26,T&R,3K"
VBUS1: library part CMP-009-00087-2, "2K2 0.063W 5% 0402 (1005 Metric)  SMD", Case/Package=0402, Power=63mW, Tolerance=5%, Mounting Technology=SMT, Pins=2
Part_A1: Reference=U
Part_B1: Reference=U1

## Free pads (board coordinates)
  round 0 hole 2.5 unplated paste+0 mask+3.5: 4(75.438,96.311) 4(108.438,48.311)
  round 0 hole 2.5 unplated mask+3.5: 5(75.438,48.311)
  round 0 hole 2.5 unplated paste-2539.97 mask+3: 5(108.438,96.311)
  round 0 hole 2.5 unplated: Un1(75.438,96.311) Un3(108.438,96.311)
  round 2.7 hole 2.7 unplated: Un4(108.438,48.311)

## Via types
v1: diameter 0.45, hole 0.35, Top Layer 1 to Bottom Layer 1, 88 vias

## Nets (pads, with @x,y where several pads share a name; then routed paths per layer and width w, separated by ;. In a path a pad name is that pad's centre, name@x,y a point inside that pad or via, vN(x,y) a via of type N, cw(c..) or ccw(c..) an arc to the next point about the centre after c; other vN are vias at no path point)
+1.8V_2: Part_A1.88 Part_A1.90 R2.1 | length 2.8
  Top Layer 1 w0.2: v1@105.085,82.657 105.178,82.657 105.321,82.8 107.28,82.8 Part_A1.88@107.68,82.4
  other v1: 105.105,82.652
+3V3: 1.2 2.2 3.2 5.2 6.2 7.2 8.2 9.2 10.2 CP1.1 CP2.1 D1.1 D2.1 J2.22 Part_A1.84 Part_A1.86 R1.1 | length 109.9
  Top Layer 1 w0.2: v1(103.933,81.915) 105.441,81.915 105.756,81.6 Part_A1.84@107.28,81.6 ; v1(106.692,82.065) 106.748,82.01 107.1,82.01 107.11,82 Part_A1.86@107.68,82 Part_A1.84@107.28,81.6 ; Part_A1.84@107.68,81.6 Part_A1.84@107.28,81.6 ; v1(112.319,81.94) 112.379,81.94 112.561,81.758 8.2@113.343,81.758 113.343,79.368 113.109,79.134 9.2@113.109,78.809 113.109,75.871 10.2@113.216,75.764
  Top Layer 1 w0.254: J2.22@91.129,44.272 91.129,45.838 91.262,45.972 v1(91.262,46.025) ; v1(94.183,49.2) 94.183,68.478 v1(100.838,75.133) ; v1(100.889,78.943) 100.925,78.943 103.897,81.915 v1(103.933,81.915) ; v1(112.649,85.039) 113.329,84.359 113.329,81.773 8.2@113.343,81.758 ; v1(117.069,87.732) 117.613,87.732 117.639,87.706 2.2@117.889,87.706 ; v1(117.094,85.496) 117.545,85.045 118.121,85.045 3.2@118.229,84.938 118.229,84.663 118.397,84.495 5.2@118.397,82.042 7.2@118.397,75.921 118.397,71.392 118.789,71 CP2.1@121,71 ; v1(117.119,89.535) 117.119,90.196 117.856,90.932 1.2@117.856,90.957 117.856,90.982 118.088,91.214 118.088,94.088 CP1.1@121,97 ; v1(118.016,88.715) 118.016,88.662 117.889,88.534 2.2@117.889,87.706 ; v1(118.999,88.849) 118.999,88.842 117.889,87.731 2.2@117.889,87.706 ; v1(120.806,89.46) 121.815,89.46 122.019,89.256 v1(122.072,89.256)
  Bottom Layer 1 w0.2: v1(106.692,82.065) 112.126,82.065 112.251,81.94 v1(112.319,81.94)
  Bottom Layer 1 w0.254: v1(91.262,46.025) 91.3,46.062 91.3,46.316 v1(94.183,49.2) ; v1(100.838,75.133) 100.863,75.159 100.863,78.918 v1(100.889,78.943) ; v1@103.923,81.905 v1(103.933,81.915) ; v1@103.989,81.877 104.569,81.297 104.997,81.297 R1.1@105.136,81.158 ; v1(112.649,85.039) 112.667,85.039 113.124,85.496 115.939,85.496 ; v1(117.069,87.732) 116.516,87.179 116.516,86.074 115.939,85.496 ; v1(117.094,85.496) 115.939,85.496 ; v1(117.119,89.535) 117.157,89.535 117.978,88.715 v1(118.016,88.715) ; v1(118.999,88.849) 119.037,88.887 119.176,88.887 D1.1@119.863,89.574 120.64,89.574 120.753,89.46 v1(120.806,89.46) ; v1(122.072,89.256) 122.125,89.256 122.176,89.205 123.081,89.205 D2.1@123.165,89.122
+5V: 12.1 15.2 16.2 J4.A4/B9 J4.B4/A9 P1.8 Part_A1.77 Part_A1.79 Part_A1.81 Part_A1.83 Part_A1.85 Part_A1.87 U1.1 VBUS1.1 | length 51.4
  Top Layer 1 w0.35: Part_A1.81@110.32,81.2 v1@111.307,81.2
  Top Layer 1 w0.4: Part_A1.77@110.32,80.4 Part_A1.79@110.32,80.8 Part_A1.81@110.32,81.2 Part_A1.83@110.32,81.6 Part_A1.85@110.32,82 Part_A1.87@110.32,82.4
  Top Layer 1 w0.5: v1@111.307,81.2 v1(111.354,81.153) ; VBUS1.1@114.028,48.649 114.028,48.624 114.053,48.624 115.118,47.559 115.118,46.83 J4.A4/B9@115.128,46.82 ; v1(114.539,74.095) 114.539,73.737 116.942,71.334 116.942,60.731 v1(114.63,58.42) ; v1(118.389,57.353) 118.389,56.779 121.147,54.021 15.2@121.147,49.787 121.147,49.512 121.148,49.51 16.2@121.148,48.722 120.423,48.722 119.828,48.127 J4.B4/A9@119.828,46.82
  Top Layer w0.5: v1(111.354,81.153) 112.674,79.832 112.674,78.232 v1(113.995,76.911)
  Bottom Layer 1 w0.5: v1(113.995,76.911) 114.336,76.571 P1.8@114.336,75.623 114.336,74.988 114.338,74.988 114.588,74.738 114.588,74.144 v1(114.539,74.095) ; v1(114.63,58.42) 114.656,58.395 114.656,57.673 114.948,57.38 116.958,57.38 117.74,58.162 12.1@117.74,58.432 118.592,58.432 ; v1(118.389,57.353) 118.389,58.229 118.592,58.432 ; U1.1@119.292,58.606 119.017,58.606 118.843,58.432 118.592,58.432
CAM_GPIO0: J2.17 Part_A1.97 | length 54.2
  Top Layer 1 w0.254: J2.17@88.629,44.272 88.652,44.295 88.652,44.914 89.408,45.67 89.408,69.215 105.639,85.446 v1(106.401,85.446) ; v1(109.373,83.668) 109.373,83.721 109.471,83.819 109.471,84.216 109.634,84.379 110.299,84.379 Part_A1.97@110.32,84.4
  Bottom Layer 1 w0.254: v1(106.401,85.446) 108.179,83.668 v1(109.373,83.668)
CAM_GPIO1: J2.18 Part_A1.100 | length 49.2
  Top Layer 1 w0.254: J2.18@89.129,44.272 89.152,44.295 89.152,44.84 89.84,45.528 89.84,69.012 105.613,84.785 Part_A1.100@107.434,84.785
CC1: CC1.1 J4.A5 Part_A1.94 | length 41.6
  Top Layer 1 w0.254: Part_A1.94@107.68,83.6 107.695,83.615 108.504,83.615 109.065,83.054 109.065,64.816 109.452,64.429 109.452,53.667 113.393,49.726 CC1.1@115.006,49.726 115.006,49.489 115.728,48.768 J4.A5@115.728,46.82
CC2: CC2.1 J4.B5 Part_A1.96 | length 48.7
  Top Layer 1 w0.254: Part_A1.96@108.123,84.021 108.532,84.021 109.065,84.554 109.065,85.189 109.699,85.823 112.882,85.823 115.641,83.063 117.201,83.063 117.657,82.607 117.657,53.692 119.273,52.075 CC2.1@119.273,49.675 118.728,49.129 J4.B5@118.728,46.82
DPHY0_C_3_N: J2.8 Part_B1.27 | length 40.4
  Top Layer 1 w0.18: Part_B1.27@76.32,70.342 76.517,70.342 76.529,70.33 76.577,70.378 77.927,70.378 78.354,70.805 82.535,70.805 83.848,69.492 83.848,56.413 84.149,56.112 84.149,55.963 84.149,54.821 cw(c83.959,54.821) 83.959,54.631 83.868,54.631 ccw(c83.868,53.961) 83.868,53.291 84.187,53.291 cw(c84.187,53.101) 84.187,52.911 83.868,52.911 ccw(c83.868,52.241) 83.868,51.571 84.187,51.571 cw(c84.187,51.381) 84.187,51.191 83.868,51.191 ccw(c83.868,50.521) 83.868,49.851 84.187,49.851 cw(c84.187,49.661) 84.187,49.471 83.868,49.471 ccw(c83.868,48.801) 83.868,48.131 83.959,48.131 cw(c83.959,47.941) 84.149,47.941 84.149,47.611 84.149,47.184 84.149,46.648 cw(c83.959,46.648) 83.959,46.458 83.799,46.458 ccw(c83.799,46.268) 83.799,46.078 83.959,46.078 cw(c83.959,45.888) 84.149,45.888 84.149,45.798 84.149,44.292 J2.8@84.129,44.272
DPHY0_C_3_P: J2.9 Part_B1.29 | length 40.4
  Top Layer 1 w0.18: Part_B1.29@76.33,70.81 76.378,70.858 77.728,70.858 78.155,71.285 82.734,71.285 82.875,71.144 83.302,70.717 84.328,69.691 84.328,56.611 84.629,56.311 84.629,55.963 84.629,54.821 cw(c83.959,54.821) 83.959,54.151 83.868,54.151 ccw(c83.868,53.961) 83.868,53.771 84.187,53.771 cw(c84.187,53.101) 84.187,52.431 83.868,52.431 ccw(c83.868,52.241) 83.868,52.051 84.187,52.051 cw(c84.187,51.381) 84.187,50.711 83.868,50.711 ccw(c83.868,50.521) 83.868,50.331 84.187,50.331 cw(c84.187,49.661) 84.187,48.991 83.868,48.991 ccw(c83.868,48.801) 83.868,48.611 83.959,48.611 cw(c83.959,47.941) 84.629,47.941 84.629,47.611 J2.9@84.629,44.272